# Altium PCB Ai-WB2-01S_modified.PcbDoc
Units mil, origin at the board's own origin, x right, y up, seen from the top; angles counter-clockwise.
Board outline 1070 x 705 mil, 4 copper layers (Top, GND, POWER, Bottom), stack 35.517 mil thick; 1 components, 0 nets, 8 pads, 0 vias.
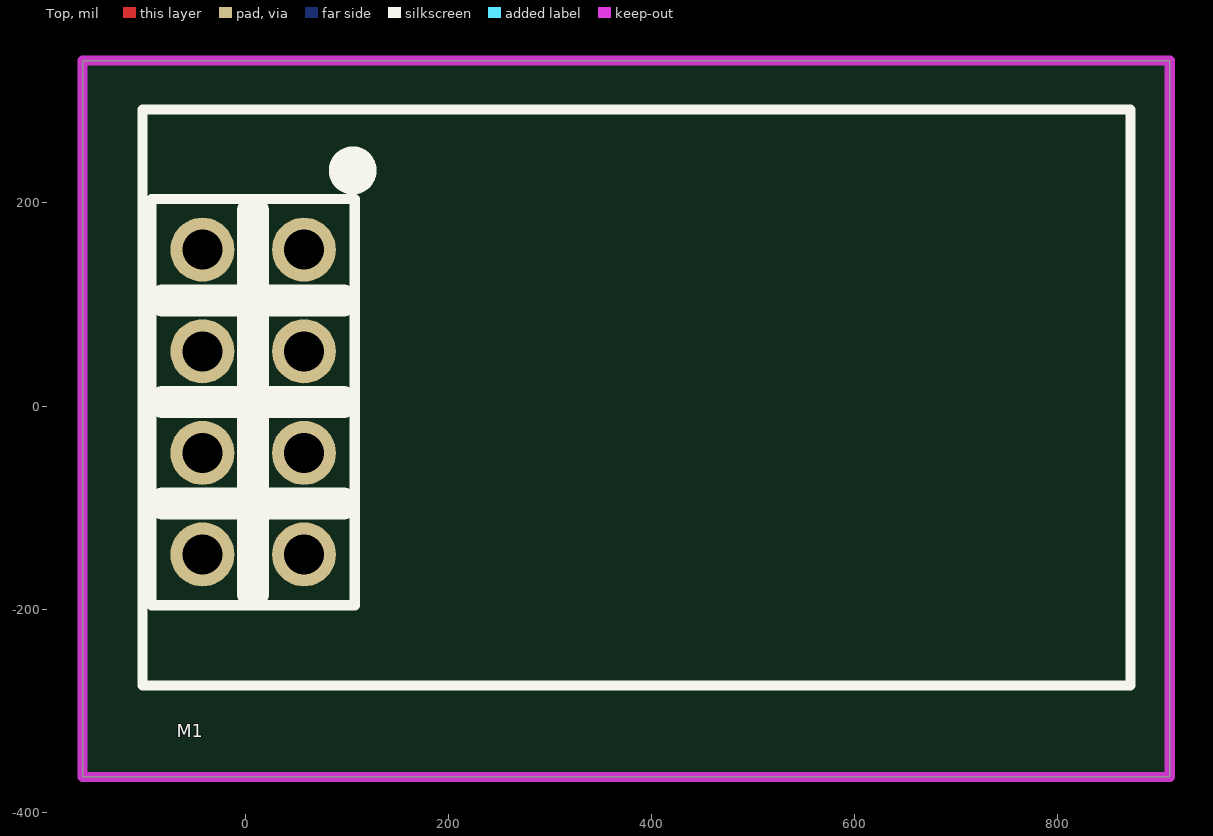
[diagram p0: Top view]
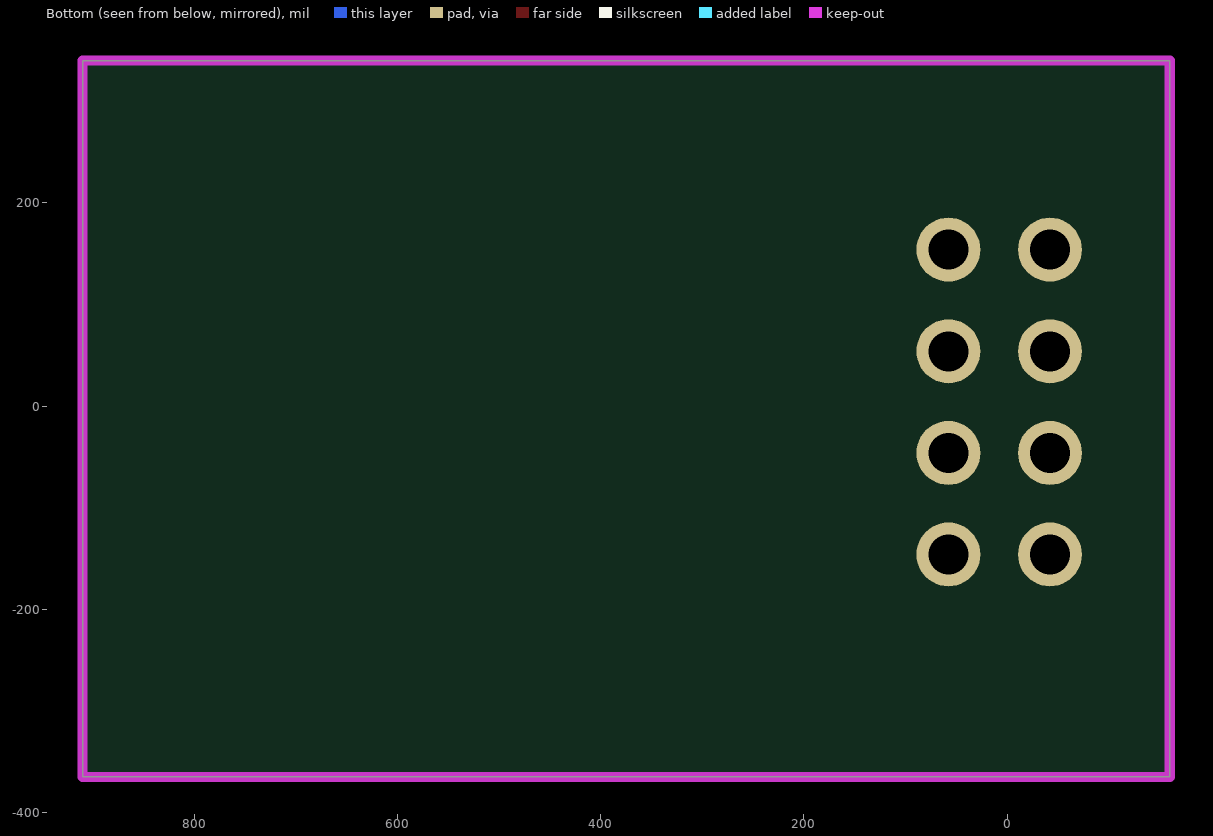
[diagram p1: Bottom view, seen from below]

## Layer stack, top to bottom
Solder Mask Top: solder mask 0.4, Solder Resist, Dk 3.5
Top: signal copper 1.4
Dielectric 1: dielectric 10, FR-4, Dk 4.2
GND: signal copper 1.35
Dielectric2: dielectric 10, FR-4, Dk 4.3
POWER: signal copper 1.35
Dielectric3: dielectric 10, FR-4, Dk 4.3
Bottom: signal copper 1.4173
Bottom Solder: solder mask 0.4, Solder Resist, Dk 3.5

## Board outline
-160,-365 910,-365 910,340 -160,340

## Design rules (kind name [scope] priority, off if disabled: settings)
Clearance "Clearance - Default - DEFAULT- SMD" [IsVia vs IsSMTPin] p1: gap=5 ignorepadtopadclearanceinfootprint=FALSE
Clearance "Clearance - Default - DEFAULT - Via" [IsVia vs IsVia] p2: gap=5 ignorepadtopadclearanceinfootprint=FALSE
Clearance "Clearance - Default - DEFAULT - Net" [All] p3: gap=5 ignorepadtopadclearanceinfootprint=FALSE except(10: Arc-Hole Track-Hole SMDPad-Hole THPad-Hole Via-Hole Fill-Fill Fill-Poly Fill-Region Fill-Hole Poly-Poly Poly-Region Poly-Hole Region-Region Region-Hole Text-Text Text-Hole)
ComponentClearance "ComponentClearance - Default - DEFAULT" [All] p1: gap=5 collisioncheckmode=3 verticalgap=10 showdistances=FALSE
FanoutControl Fanout_Small [(CompPinCount < 5)] p3: bgadir=Out bgaviamode=Centered fanoutstyle=Auto fanoutdirection=OutThenIn viagrid=1 // Fanout_Small (Default Rule)
FanoutControl Fanout_SOIC [IsSOIC] p4: bgadir=Out bgaviamode=Centered fanoutstyle=Auto fanoutdirection=Alternating viagrid=1 // Fanout_SOIC (Default Rule)
HoleToHoleClearance "HoleToHoleClearance - Default - DEFAULT" [All] p1: gap=5 allowstackedmicrovias=TRUE
Length "Default Length" [All] p1: maxlimit=50000 minlimit=0
MaxMinImpedance "Default Impedance" [All] p1: minimum=50.00 maximum=150.0
ParallelSegment "Default Parallel Segment Adjasent" [All] p1: limit=1000 gap=200
ParallelSegment "Default Parallel Segment Same Layer" [All] p2: limit=1000 gap=200
PlaneConnect "Default PlaneConnect" [All] p1: planeconnectstyle=Direct reliefexpansion=20 reliefentries=4 reliefconductorwidth=15 reliefairgap=10
PolygonConnect "PolygonConnect - Default SMT" [IsSMTPin] p1: connectstyle=Direct reliefconductorwidth=10 reliefentries=4 polygonreliefangle="45 Angle" airgapwidth=10
PolygonConnect "PolygonConnect - Default Pad" [All] p2: connectstyle=Direct reliefconductorwidth=15 reliefentries=4 polygonreliefangle="45 Angle" airgapwidth=10
RoutingLayers "RoutingLayers - Default - DEFAULT" [All] p1: top layer_v5=TRUE mid layer 1_v5=TRUE mid layer 2_v5=TRUE bottom layer_v5=TRUE
RoutingPriority "RoutingPriority - Default - DEFAULT" [All] p1: routingpriority=3
RoutingTopology "Default Routing Topology" [All] p1: topology=Shortest
RoutingVias "RoutingVias - Default - DEFAULT" [All] p1: holewidth=10 width=16 viastyle="Through Hole" minholewidth=10 minwidth=16 maxholewidth=10 maxwidth=16
SMDToCorner "SMDToCorner - Default - DEFAULT" [All] p1: distance=50000
SolderMaskExpansion [All] p1: expansion=4 istentingtop=FALSE
Width "Default Width" [All] p1: maxlimit=6 minlimit=4 preferedwidth=5
22 further rules are at their usual default settings.

## Components (designator, comment, footprint, x,y, rotation, side; value= is the part's Value field where it differs from the comment)
M1 "MODULE_ATK_AI-WB2-01S_PCB" MODULE_ATK_AI-WB2-01S_PCB 7.87,3.94 r0 top

## Footprints (in the part's own frame and the unit in brackets; to place one, negate y for a bottom-side part, rotate by r counter-clockwise, add the part's x,y. Pads: shape width x height; smd on the part's side, far side on the other; paste and mask are expansions set on the pad)
MODULE_ATK_AI-WB2-01S_PCB [mm]
  round 1.6 hole 1: 1(1.27,3.81) 2(1.27,1.27) 3(1.27,-1.27) 4(1.27,-3.81) 5(-1.27,3.81) 6(-1.27,1.27) 7(-1.27,-1.27) 8(-1.27,-3.81)
  silkscreen extent -2.77,-7.09 21.93,7.31

## Nets (pads, with @x,y where several pads share a name; then routed paths per layer and width w, separated by ;. In a path a pad name is that pad's centre, name@x,y a point inside that pad or via, vN(x,y) a via of type N, cw(c..) or ccw(c..) an arc to the next point about the centre after c; other vN are vias at no path point)
pads on no net: M1.1 M1.2 M1.3 M1.4 M1.5 M1.6 M1.7 M1.8

## Keep-outs
Keep-Out Layer:
  the board outline again, w10